# Altium PCB Board.Old.PcbDoc
Units mil, origin at the board's own origin, x right, y up, seen from the top; angles counter-clockwise.
Board outline 3937.99 x 2755.91 mil, 2 copper layers (Top Layer, Bottom Layer); 52 components, 38 nets, 147 pads, 112 vias.
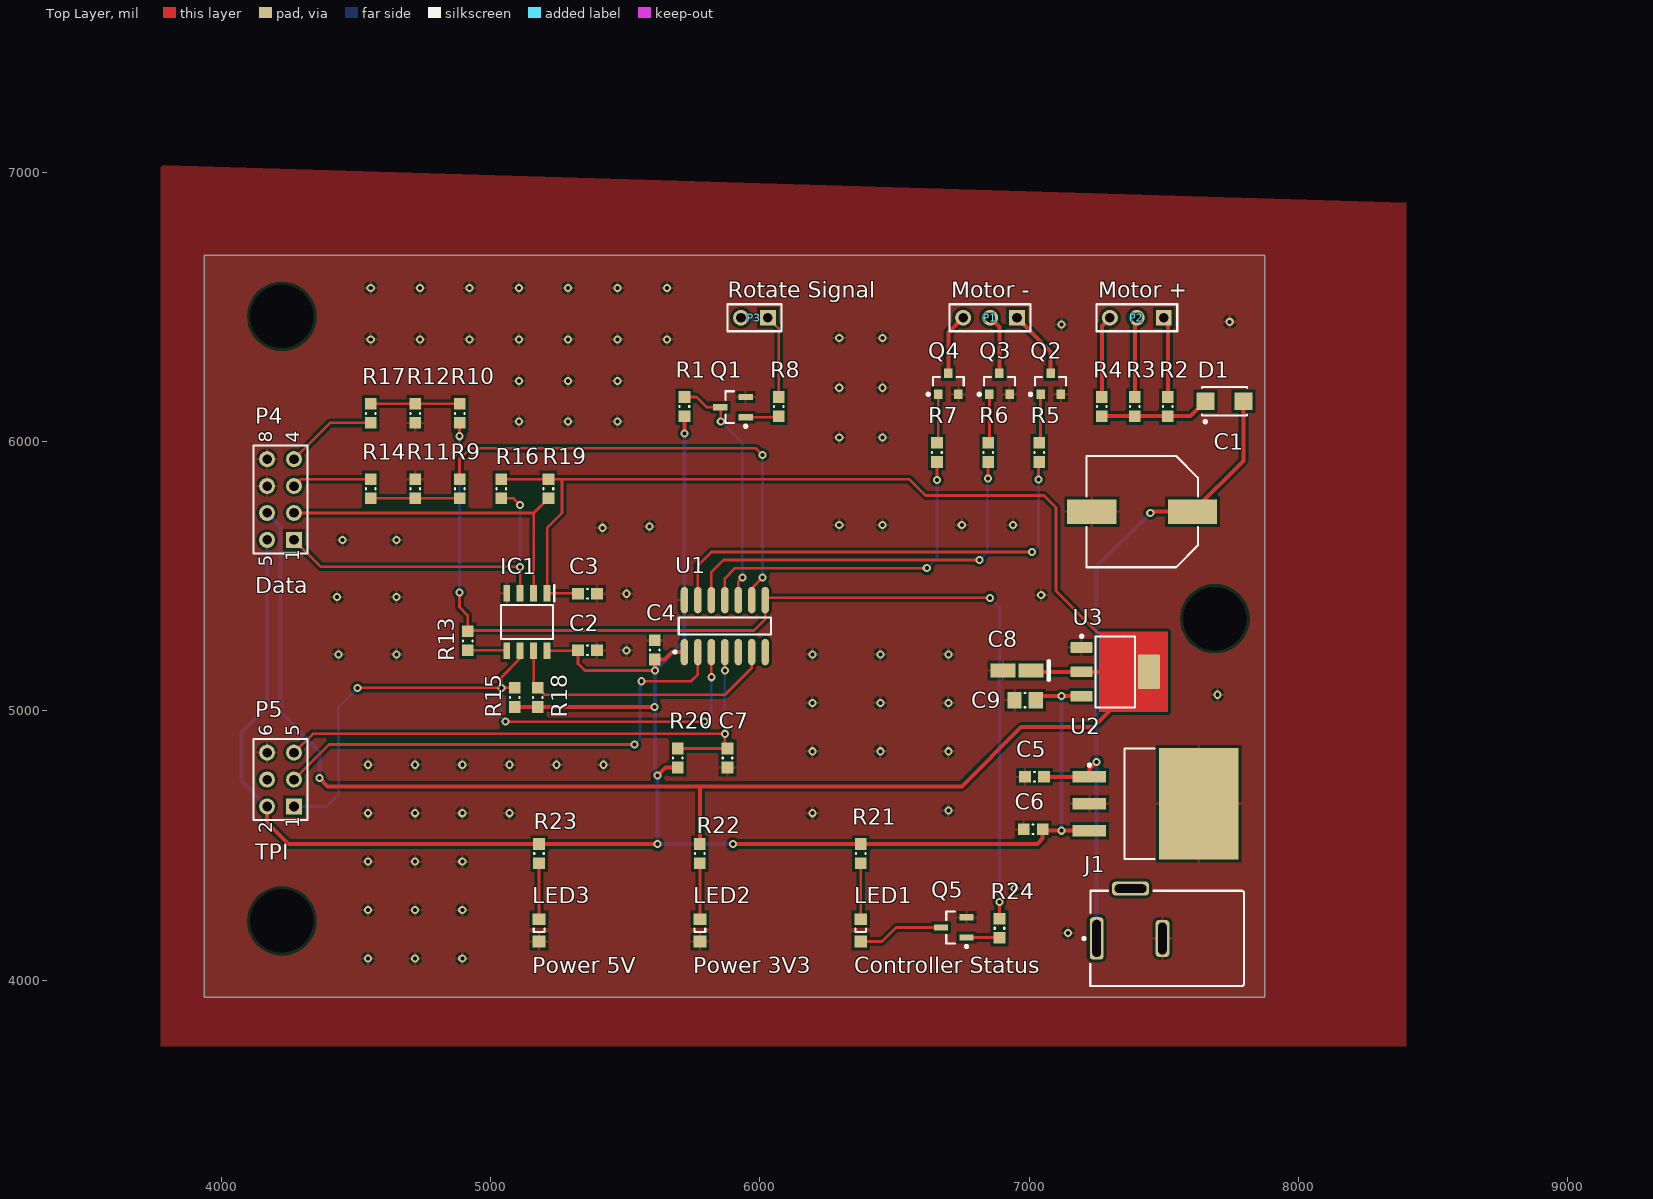
[diagram p0: Top Layer view]
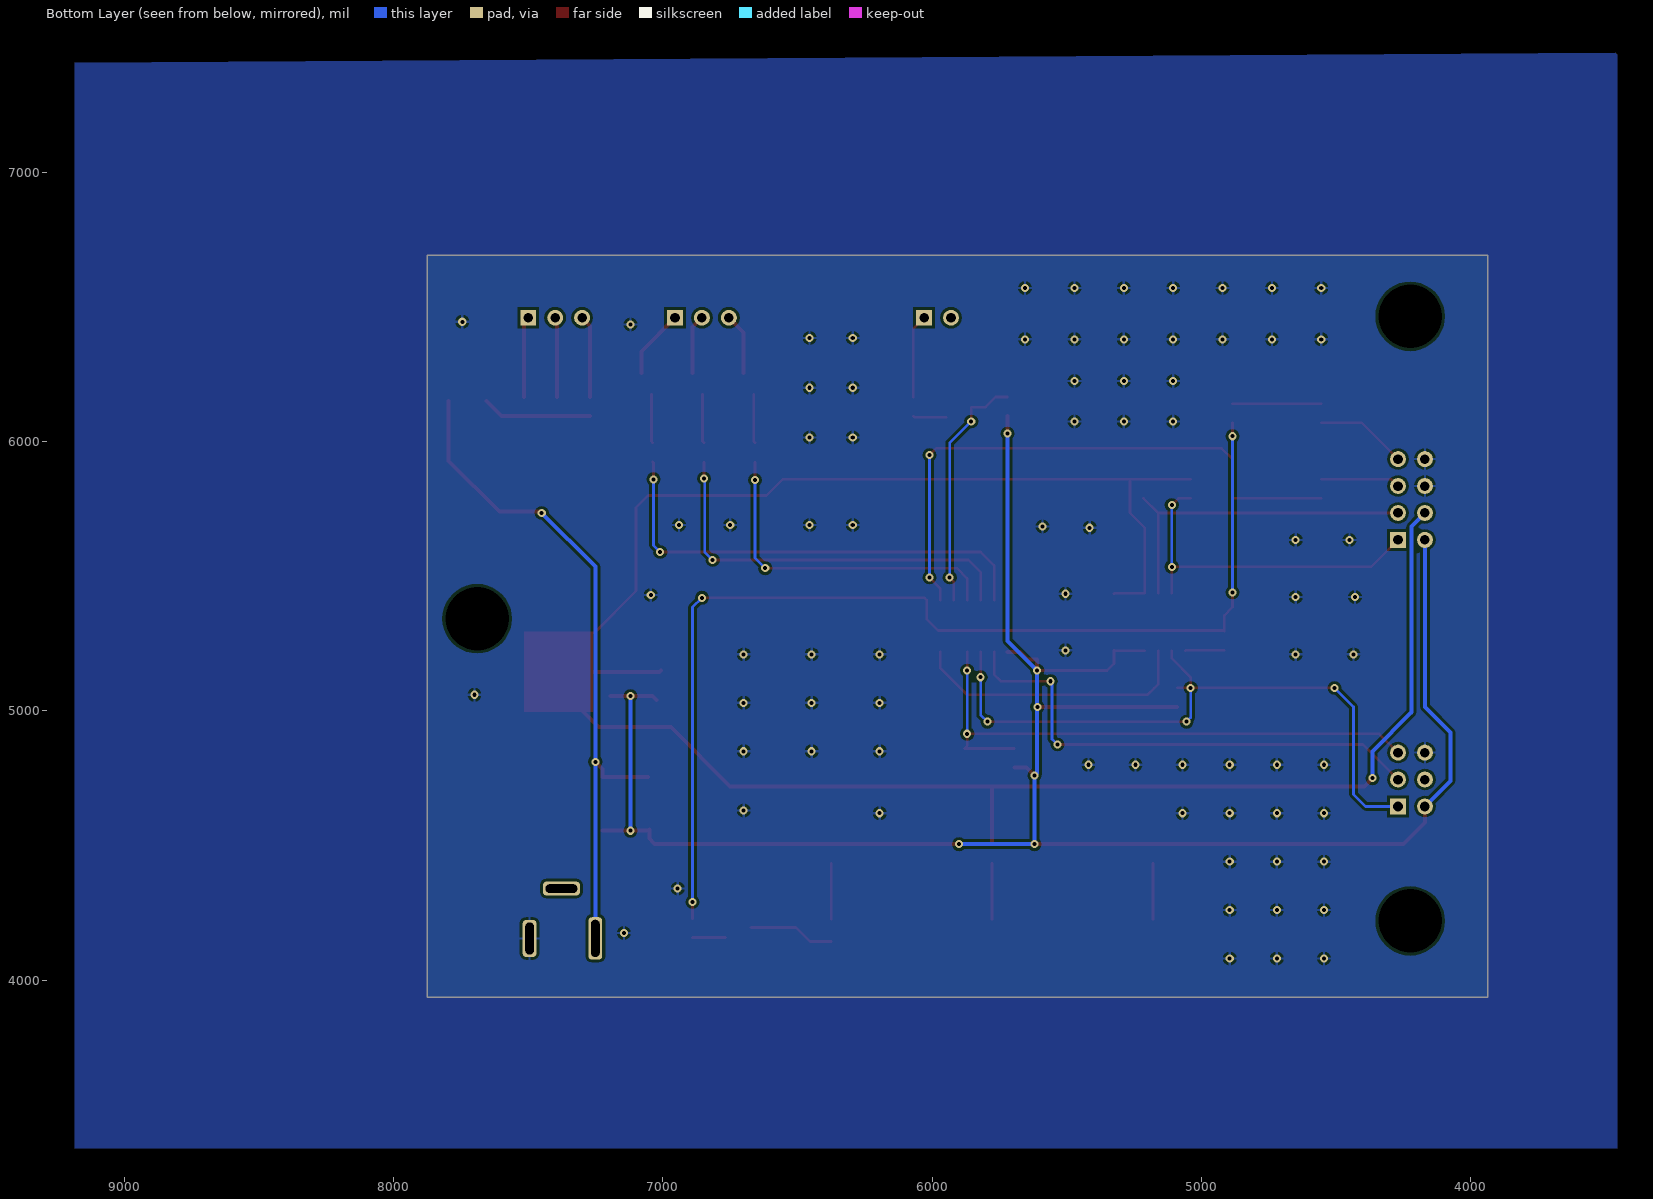
[diagram p1: Bottom Layer view, seen from below]

## Layer stack, top to bottom
Top Solder: solder mask 0.4, Solder Resist, Dk 3.5
Top Layer: signal copper 1.4
Dielectric 1: dielectric 12.6, FR-4, Dk 4.8
Bottom Layer: signal copper 1.4
Bottom Solder: solder mask 0.4, Solder Resist, Dk 3.5

## Board outline
3937.01,3937.01 3937.01,6692.91 7875,6692.91 7875,3937.01

## Design rules (kind name [scope] priority, off if disabled: settings)
Clearance [All] p1: gap=10 ignorepadtopadclearanceinfootprint=TRUE except(0: Arc-Hole Track-Hole SMDPad-Hole THPad-Hole Via-Hole Fill-Hole Poly-Hole Region-Hole Text-Hole)
PolygonConnect [All] p1: connectstyle=Relief reliefconductorwidth=10 reliefentries=4 polygonreliefangle="90 Angle" airgapwidth=10
RoutingVias [All] p1: holewidth=15 width=30 viastyle="Through Hole" minholewidth=12 minwidth=24 maxholewidth=100 maxwidth=200
SolderMaskExpansion [All] p1: expansion=4
Width [All] p1: maxlimit=1000 minlimit=6 preferedwidth=10
30 further rules are at their usual default settings.

## Components (designator, comment, footprint, x,y, rotation, side; value= is the part's Value field where it differs from the comment)
C1 "220uF" PNSC-ZA-G_M 7420,5740 r180 top
C2 "100nF" CAPC0603(1608)100_M 5360,5224.69 r180 top
C3 "100nF" CAPC0603(1608)100_M 5360,5435.31 r180 top
C4 "100nF" CAPC0603(1608)100_M 5610,5226.42 r270 top
C5 "220nF" CAPC0603(1608)100_M 7020,4755 r0 top
C6 "100nF" CAPC0603(1608)100_M 7015,4560 r0 top
C7 "100nF" CAPC0603(1608)100_M 5880,4825 r90 top
C8 "22uF" KEMT-A-3216-18-2_M 6955,5150 r180 top
C9 "22uF" CAPC0805(2012)145_M 6985,5040 r0 top
D1 "SS14-E3/5AT" VISH-DO-214AC-2_V 7725,6150 r180 top
IC1 "TCA9517DR" SOIC127P600X175-8N 5135,5330 r270 top
J1 "PWR" KYCN-KLDX-0202-A_V 7495,4155 r0 top
LED1 "Controller Status" 0805_A 6375,4185 r90 top
LED2 "Power 3V3" 0805_A 5777.5,4185 r90 top
LED3 "Power 5V" 0805_A 5180,4185 r90 top
P1 "Motor -" HDR1X3 6955,6460 r180 top
P2 "Motor +" HDR1X3 7500,6460 r180 top
P3 "Rotate Signal" HDR1X2 6030,6460 r180 top
P4 "Data" HDR2X4_CEN 4270,5635 r90 top
P5 "TPI" HDR2X3 4270,4645 r90 top
Q1 "2N7002" INF-PG-SOT23_M 5900,6128.03 r180 top
Q2 "NTR4003NT1G" ONSC-SOT-23-3-318-08_V 7080,6215 r90 top
Q3 "NTR4003NT1G" ONSC-SOT-23-3-318-08_V 6890,6215 r90 top
Q4 "NTR4003NT1G" ONSC-SOT-23-3-318-08_V 6700,6215 r90 top
Q5 "2N7002" INF-PG-SOT23_M 6720,4195.83 r180 top
R1 "5K1 5% 0603(1608)" RESC0603(1608)_M 5720,6130 r270 top value="5100.00 Ohm"
R2 "27R 5% 0603(1608)" RESC0603(1608)_M 7515,6130 r90 top value="27.00 Ohm"
R3 "27R 5% 0603(1608)" RESC0603(1608)_M 7392.5,6130 r90 top value="27.00 Ohm"
R4 "27R 5% 0603(1608)" RESC0603(1608)_M 7270,6130 r90 top value="27.00 Ohm"
R5 "5K1 5% 0603(1608)" RESC0603(1608)_M 7037.68,5960 r90 top value="5100.00 Ohm"
R6 "5K1 5% 0603(1608)" RESC0603(1608)_M 6847.68,5960 r90 top value="5100.00 Ohm"
R7 "5K1 5% 0603(1608)" RESC0603(1608)_M 6657.68,5960 r90 top value="5100.00 Ohm"
R8 "10K 5% 0603(1608)" RESC0603(1608)_M 6070,6130 r90 top value="10000.00 Ohm"
R9 "2K 1% 0603(1608)" RESC0603(1608)_M 4885,5825 r90 top value="2000.00 Ohm"
R10 "2K 1% 0603(1608)" RESC0603(1608)_M 4885,6105 r270 top value="2000.00 Ohm"
R11 "3K9 1% 0603(1608)" RESC0603(1608)_M 4720,5825 r270 top value="3900.00 Ohm"
R12 "3K9 1% 0603(1608)" RESC0603(1608)_M 4720,6105 r90 top value="3900.00 Ohm"
R13 "5K1 5% 0603(1608)" RESC0603(1608)_M 4915,5260.12 r90 top value="5100.00 Ohm"
R14 "3K3 5% 0603(1608)" RESC0603(1608)_M 4555,5825 r270 top value="3300.00 Ohm"
R15 "10K 5% 0603(1608)" RESC0603(1608)_M 5090,5050 r270 top value="10000.00 Ohm"
R16 "10K 5% 0603(1608)" RESC0603(1608)_M 5040,5825 r90 top value="10000.00 Ohm"
R17 "3K3 5% 0603(1608)" RESC0603(1608)_M 4555,6105 r90 top value="3300.00 Ohm"
R18 "10K 5% 0603(1608)" RESC0603(1608)_M 5175,5050 r270 top value="10000.00 Ohm"
R19 "10K 5% 0603(1608)" RESC0603(1608)_M 5215,5825 r90 top value="10000.00 Ohm"
R20 "4K7 5% 0603(1608)" RESC0603(1608)_M 5695,4825 r270 top value="4700.00 Ohm"
R21 "270R 5% 0603(1608)" RESC0603(1608)_M 6375,4470 r90 top value="270.00 Ohm"
R22 "160R 5% 0603(1608)" RESC0603(1608)_M 5777.5,4470 r90 top value="160.00 Ohm"
R23 "270R 5% 0603(1608)" RESC0603(1608)_M 5180,4470 r90 top value="270.00 Ohm"
R24 "5K1 5% 0603(1608)" RESC0603(1608)_M 6890,4192.87 r270 top value="5100.00 Ohm"
U1 "ATtiny20-SSU" 14S1_M 5870,5315 r90 top
U2 "LM7805SX/NOPB" KTT0003B_M 7470,4655 r0 top
U3 "AMS1117-3.3" DCY0004A_M 7320,5145 r0 top

## Footprints (in the part's own frame and the unit in brackets; to place one, negate y for a bottom-side part, rotate by r counter-clockwise, add the part's x,y. Pads: shape width x height; smd on the part's side, far side on the other; paste and mask are expansions set on the pad)
14S1_M [mm] "SOIC, 14-Leads, Body 8.7x3.9mm, Pitch 1.27mm, IPC Low Density"
  oval 2.5x0.7 smd: 1(-2.45,3.81) 2(-2.45,2.54) 3(-2.45,1.27) 4(-2.45,0) 5(-2.45,-1.27) 6(-2.45,-2.54) 7(-2.45,-3.81) 8(2.45,-3.81) 9(2.45,-2.54) 10(2.45,-1.27) 11(2.45,0) 12(2.45,1.27) 13(2.45,2.54) 14(2.45,3.81)
  silkscreen extent -2.57,-4.35 0.8,4.83, body extent -1.99,-4.37 1.99,4.37, height 1.75
0805_A [mm] "Chip LED, 2-Leads, Body 2.0x1.3mm, IPC Medium Density"
  rect 1.1x1.2 smd: 1(-1.05,0) 2(1.05,0)
  silkscreen extent -0.15,-0.5 0.15,0.5, body extent -1,-0.62 1,0.63, height 0.68
CAPC0603(1608)100_M [mm] "Chip Capacitor, Body 1.6x0.8mm, Height 1.0mm, IPC Low Density"
  rect 1.1x1.1 smd: 1(-0.9,0) 2(0.9,0)
  silkscreen extent -0.05,-0.45 0.05,0.45, body extent -0.87,-0.47 0.88,0.48, height 1
CAPC0805(2012)145_M [mm] "Chip Capacitor, Body 2.0x1.2mm, Height 1.45mm, IPC Low Density"
  rect 1.35x1.55 smd: 1(-1,0) 2(1,0)
  silkscreen extent -0.05,-0.67 0.05,0.67, body extent -1.1,-0.72 1.1,0.72, height 1.45
DCY0004A_M [mm] "SOT223, 4-Leads, Body 6.7x3.7mm, Pitch 2.3mm, IPC Low Density"
  rrect10% 2.05x1 smd: 1(-3.175,2.3) 2(-3.175,0) 3(-3.175,-2.3)
  rrect5% 2.05x3.25 smd: 4(3.175,0)
  silkscreen extent -3.3,-3.35 1.85,3.47, body extent -3.5,-3.25 3.5,3.25, height 1.62
HDR1X2 [mm] "Connector; Header; 2 Position"
  rect 1.5x1.5 hole 0.9: 1(0,0)
  round 1.5 hole 0.9: 2(2.54,0)
  silkscreen extent -1.27,-1.27 3.81,1.27
HDR1X3 [mm] "Connector; Header; 3 Position"
  rect 1.5x1.5 hole 0.9: 1(0,0)
  round 1.5 hole 0.9: 2(2.54,0) 3(5.08,0)
  silkscreen extent -1.27,-1.27 6.35,1.27
HDR2X3 [mm] "Connector; Header; 3x2 Position"
  rect 1.5x1.5 hole 0.9: 1(0,0)
  round 1.5 hole 0.9: 2(0,2.54) 3(2.54,0) 4(2.54,2.54) 5(5.08,0) 6(5.08,2.54)
  silkscreen extent -1.27,-1.27 6.35,3.81
HDR2X4_CEN [mm] "Connector; Header; 4x2 Position"
  rect 1.5x1.5 hole 0.9: 1(0,0)
  round 1.5 hole 0.9: 2(2.54,0) 3(5.08,0) 4(7.62,0) 5(0,2.54) 6(2.54,2.54) 7(5.08,2.54) 8(7.62,2.54)
  silkscreen extent -1.27,-1.27 8.89,3.81
INF-PG-SOT23_M [mm] "SOT23, 3-Leads, Body 2.9x1.3mm, Pitch 0.95mm, IPC Low Density"
  rect 1.35x0.6 smd: 1(-1.2,0.95) 2(-1.2,-0.95) 3(1.2,0)
  silkscreen extent -1.33,-1.5 0.7,1.92, body extent -0.7,-1.5 0.7,1.5, height 1.1
KEMT-A-3216-18-2_M [mm] "Molded TAN Capacitor, 2-Leads, Body 3.4x1.8mm, IPC Low Density"
  rect 2.35x1.35 smd: 1(-1.325,0) 2(1.325,0)
  silkscreen extent -3,-0.9 -3,0.9, body extent -1.7,-0.9 1.7,0.9, height 1.8
KTT0003B_M [mm] "D2-PAK, 3-Leads, Body 10.41x8.89mm, Pitch 2.54mm, IPC Low Density"
  rect 3.15x1.1 smd: 1(-6.25,2.54) 2(-6.25,0) 3(-6.25,-2.54)
  rect 7.5x10.55 smd: 4(4.05,0)
  silkscreen extent -6.37,-5.2 -0.1,5.2, body extent -6.67,-5.2 7.68,5.2, height 4.64
KYCN-KLDX-0202-A_V [mm] "Power Jack, 3-Leads, Body 14.5x9mm"
  rrect50% 1.3x4 hole 0.8 slot 3.5 at 90 deg: 1(-6.2,0)
  rrect50% 1.3x3.5 hole 0.8 slot 3 at 90 deg: 2(0,0)
  rrect50% 3.5x1.3 hole 0.8 slot 3 at 0 deg: 3(-3,4.7)
  silkscreen extent -7.52,-4.5 7.7,4.5, body extent -6.8,-4.5 7.7,4.9, height 10.8
ONSC-SOT-23-3-318-08_V [mm] "SOT23, 3-Leads, Body 2.92x1.3mm, Pitch 0.95mm"
  rect 0.9x0.8 smd: 1(-1,0.95) 2(-1,-0.95) 3(1,0)
  silkscreen extent -1.12,-1.46 0.65,2.02, body extent -0.65,-1.46 0.65,1.46, height 1.11
PNSC-ZA-G_M [mm] "Aluminum Electrolytic Capacitor, Body 10.30x10.30x10.50mm, IPC Low Density"
  rect 4.65x2.3 smd: 1(-4.75,0) 2(4.75,0)
  silkscreen extent -5.25,-5.25 5.25,5.25, body extent -6,-5.25 6,5.25, height 10.5
RESC0603(1608)_M [mm] "Chip Resistor, Body 1.6x0.8mm, IPC Low Density"
  rect 1.1x1.1 smd: 1(-0.9,0) 2(0.9,0)
  silkscreen extent -0.05,-0.45 0.05,0.45, body extent -0.85,-0.47 0.85,0.47, height 0.6
SOIC127P600X175-8N [mm]
  rect 1.525x0.65 smd: 1(-2.712,1.905) 2(-2.712,0.635) 3(-2.712,-0.635) 4(-2.712,-1.905) 5(2.712,-1.905) 6(2.712,-0.635) 7(2.712,0.635) 8(2.712,1.905)
  silkscreen extent -3.47,-2.45 1.6,2.58, body extent -3,-2.45 3,2.45, height 1.75
VISH-DO-214AC-2_V [mm] "SMA, 2-Leads, Body 4.245x2.665mm, Height 2.29mm"
  rect 1.7x1.68 smd: 1(-1.79,0) 2(1.79,0)
  silkscreen extent -2.12,-1.33 2.12,2.06, body extent -2.57,-1.33 2.57,1.33, height 2.29

## Part data
C1: library part CMP-2000-06221-1, "Conductive Polymer Hybrid Aluminum Electrolytic Capacitor, 220 uF, +/- 20%, 50 V, -55 to 105 degC, 2-Pin SMD (G), RoHS, Tape and Reel", Capacitance=100uF, Case Diameter=10mm, Case Height=10.5mm, Case Length=10.2mm, Manufacturer=Panasonic, Maximum Operating Temperature=+105C, Minimum Operating Temperature=-55C, Package Description="2-Pin Surface Mount Device, Body 10.3 x 10.3 mm", Package Reference=ZA-G, Ripple Current=2A, Tolerance=20%, Voltage Rating DC=50V, Brand=Panasonic, Datasheet URL=https://industrial.panasonic.com/cdbs/www-data/pdf/RDD0000/DMD0000COL56.pdf, Datasheet Version=06/2016, ESR=28mOhms, Factory Pack Quantity=500, Height=10.5mm, Load Life=10000Hour, Manufacturer URL=http://www.panasonic.com/, Mounting Technology=SurfaceMount, Packaging=Reel, Product=AluminumElectrolyticCapacitors, Product Category=AluminumOrganicPolymerCapacitors, RoHS=Details, Series=ZA, Termination Style=SMD/SMT
C2 C3 C4 C6 C7: library part CMP-1035-02592-1, "CAP 100nF 50V ±10% 0603 (1608 Metric) Thickness 1mm SMD", Case-EIA=0603, Case-Metric=1608, Rated Voltage="50 V", Tolerance=?±10%, Max Thickness="1 mm", Technology=SMT
C5: library part CMP-1035-02644-1, "CAP 220nF 16V ±10% 0603 (1608 Metric) Thickness 1mm SMD", Case-EIA=0603, Case-Metric=1608, Rated Voltage="16 V", Tolerance=?±10%, Max Thickness="1 mm", Technology=SMT
C8: library part CMP-2000-05173-1, "Capacitor, Tantalum, 22 uF, +/- 10%, 16 V, -55 to 125 degC, 2-Pin SMD (1206), RoHS, Tape and Reel", Capacitance=10uF, Case Code=A, Case Style=Molded, Manufacturer=Kemet, Operating Temp Range=-55Cto125C, Package / Case=3216-18, Package Description="2-Pin Surface Mount Device, Body 3.2 x 1.6 mm", Package Reference=1206, Tolerance (+ or -)=10%, Voltage=16VDC, Construction=SMTChip, Datasheet URL=http://www.farnell.com/datasheets/1824869.pdf, Datasheet Version=Apr-14, DCL=1.6uA, DF=8%, ESR=7ohm, Failure Rate=NotRequired, Insulation=NotRequired, Lead Spacing (nom)=NotRequiredmm, Length W/Weld=NotRequiredmm, Manufacturer URL=http://www.kemet.com/, Mounting Style=SurfaceMount, Packaging=TapeandReel, Polarity=Polar, Product Depth (mm)=1.6mm, Product Diameter (mm)=NotRequiredmm, Product Height (mm)=1.6mm, Product Length (mm)=3.2mm, Seal=NotRequired, Seated Plane Height=NotRequiredmm, Wire Form=NotRequired
C9: library part CMP-1036-04942-1, "CAP 22uF 10V ±10% 0805 (2012 Metric) Thickness 1.45mm SMD", Case-EIA=0805, Case-Metric=2012, Rated Voltage="10 V", Tolerance=?±10%, Max Thickness="1.45 mm", Technology=SMT
D1: library part CMP-0549-00004-1, "Schottky Barrier Rectifier, 40 V Maximum DC Blocking Voltage, -65 to 125 degC, 2-Pin SMA Case, RoHS", Manufacturer="Vishay Semiconductor", Operating Temperature="-65 to 125 degC", ComponentLink1Description="Manufacturer URL", ComponentLink1URL=http://www.vishay.com/, ComponentLink2Description=Datasheet, ComponentLink2URL=http://www.vishay.com/docs/88746/ss12.pdf, ComponentLink3Description="Package Specification", ComponentLink3URL=http://www.vishay.com/docs/88746/ss12.pdf, DatasheetVersion=12/17/2012, IF(AV)="1 A Max.", IFSM="40 A", Mounting Technology="Surface Mount", PackageDescription="2-Pin SMD, Body 4.245 x 2.665 mm, Height 2.29 mm", PackageReference=DO-214AC-2, PackageVersion=Dec-12, PartNumber=SS14-E3/5AT, RoHS=TRUE, VDC="40 V Max.", VRMS="28 V Max.", VRRM="40 V Max."
IC1: "Integrated Circuit", Manufacturer_Name="Texas Instruments", Mouser Part Number=595-TCA9517DR, Datasheet Link=http://www.farnell.com/datasheets/1959556.pdf, Height=1.75mm, Manufacturer_Part_Number=TCA9517DR, Mouser Price/Stock=https://www.mouser.com/Search/Refine.aspx?Keyword=595-TCA9517DR
J1: library part CMP-1673-00001-5, "DC Power Jack, 24 V, 3.5 A, -25 to 85 degC, 3-Pin THD, RoHS", Colour=Black, Current Rating="3.5 A", Manufacturer=Kycon, Max Operating Temperature="85 degC", Min Operating Temperature="-25 degC", Package Quantity=500, Voltage Rating="24 V", ComponentLink1Description="Manufacturer URL", ComponentLink1URL=http://www.kycon.com/, ComponentLink2Description=Datasheet, ComponentLink2URL=http://www.kycon.com/Pub_Eng_Draw/KLDX-0202-X.PDF, Connector Type=Power, Contact Gender=Female, Contact Material=Brass, Contact Plating=Tin, DatasheetVersion="Rev. D3, 06/2013", Height="10.8 mm", Housing Material=PBT, Length="9.2 mm", Mount="Through Hole", Mounting Technology="Through Hole", PackageDescription="3-Pin Through Hole Device, Body 14.5 x 9 mm", PackageReference=KLDX-0202-A, Pins=2, RoHSCompliant=true
LED1: library part CMP-1426-00008-1, "SMD mono-color Chip LED, WL-SMCW, Blue", Color=Blue, Manufacturer="Wuerth Elektronik", PartNumber=150080BS75000, ComponentLink1Description="Manufacturer URL", ComponentLink1URL=http://www.we-online.com, ComponentLink2Description=Datasheet, ComponentLink2URL=http://katalog.we-online.com/led/datasheet/150080BS75000.pdf, PackageReference=0805_A
LED2 LED3: library part CMP-1426-00007-1, "SMD mono-color Chip LED, WL-SMCW, Green", Color=Green, Manufacturer="Wuerth Elektronik", PartNumber=150080GS75000, ComponentLink1Description="Manufacturer URL", ComponentLink1URL=http://www.we-online.com, ComponentLink2Description=Datasheet, ComponentLink2URL=http://katalog.we-online.com/led/datasheet/150080GS75000.pdf, PackageReference=0805_A
P1 P2: library part "Header 3", "Header, 3-Pin", LatestRevisionDate=17-Jul-2002, LatestRevisionNote="Re-released for DXP Platform.", Publisher="Altium Limited"
P3: library part "Header 2", "Header, 2-Pin", LatestRevisionDate=17-Jul-2002, LatestRevisionNote="Re-released for DXP Platform.", Publisher="Altium Limited"
P4: library part "Header 4X2A", "Header, 4-Pin, Dual row", LatestRevisionDate=17-Jul-2002, LatestRevisionNote="Re-released for DXP Platform.", Publisher="Altium Limited"
P5: library part "Header 3X2", "Header, 3-Pin, Dual row", LatestRevisionDate=17-Jul-2002, LatestRevisionNote="Re-released for DXP Platform.", Publisher="Altium Limited"
Q1 Q5: library part CMP-1149-00026-1, "N-Channel OptiMOS Small-Signal-Transistor, 60 V VDS, 0.3?A ID, -55 to 150 degC, PG-SOT23, Reel, Green", Manufacturer=Infineon, ComponentLink1Description="Manufacturer URL", ComponentLink1URL=http://www.infineon.com/, ComponentLink2Description=Datasheet, ComponentLink2URL=http://www.infineon.com/dgdl/2N7002_Rev2.4.pdf?folderId=db3a3043156fd573011622e10b5c1f67&fileId=db3a304319bc939a0119c2a9461e79e6, ComponentLink3Description="Package Specification", ComponentLink3URL=http://www.infineon.com/dgdl/SOT23-Package_Overview.pdf?folderId=db3a30431936bc4b0119532290053c66&fileId=db3a30431936bc4b0119533468123c85, DatasheetVersion="Rev. 2.4", Green=TRUE, Halogen-free=TRUE, ID (max)=0.3??A, IDpuls (max)=1.2??A, Mounting Technology="Surface Mount", PackageDescription="3-Pin Small Outline Transistor Package, 2.9 x 1.3 mm Body, 0.95 mm Pitch", PackageReference=PG-SOT23, PackageVersion=Apr-08, Packing=Reel, PartNumber=2N7002, Ptot (max)=0.5??W, QG=0.4??nC, RDS (on) (max)="3,000 mOhm", RDS (on) (max) (@4.5V)="4,000 mOhm", RthJA (max)="250 K/W", VDS (max)="60 V", VGS(th) (max)=2.5??V, VGS(th) (min)=1.5??V
Q2 Q3 Q4: library part CMP-1058-00759-1, "Small Signal MOSFET, 30 V, 0.56 A, Single N-Channe, 3-Pin SOT-23, Pb-Free, Tape and Reel", Manufacturer="On Semiconductor", Package Type=SOT-23-3, Channel Polarity="N Channel", Ciss Typ (pF)=21, ComponentLink1Description="Manufacturer URL", ComponentLink1URL=http://www.onsemi.com/, ComponentLink2Description=Datasheet, ComponentLink2URL=http://www.onsemi.cn/pub_link/Collateral/NTR4003N-D.PDF, ComponentLink3Description="Package Specification", ComponentLink3URL=http://www.onsemi.cn/pub_link/Collateral/318-08.PDF, Configuration=Single, Coss Typ (pF)=19.7, Crss Typ (pF)=8.1, DatasheetVersion="Rev. 3", ID Max (A)=0.56, Mounting Technology="Surface Mount", PackageDescription="3-Pin Small Outline Transistor, Body 2.92 x 1.3 mm, Pitch 0.95 mm", PackageReference=SOT-23-3-318-08, PackageVersion="Rev. AP, 11/2009", Packing="Tape and Reel", PartNumber=NTR4003NT1G, RoHS=Pb-Free, V(BR)DSS Min (V)=30, VGS(th) Max (V)=1.4, VGS Max (V)=20
R1 R5 R6 R7 R13 R24: library part CMP-1012-00091-1, "5K1 0.1W 5% 0603 (1608 Metric)  SMD", Case-EIA=0603, Case-Metric=1608, Power="0.1 W", Tolerance="5 %", Technology=SMT
R2 R3 R4: library part CMP-1012-00036-1, "27R 0.1W 5% 0603 (1608 Metric)  SMD", Case-EIA=0603, Case-Metric=1608, Power="0.1 W", Tolerance="5 %", Technology=SMT
R8 R15 R16 R18 R19: library part CMP-1012-00098-1, "10K 0.1W 5% 0603 (1608 Metric)  SMD", Case-EIA=0603, Case-Metric=1608, Power="0.1 W", Tolerance="5 %", Technology=SMT
R9 R10: library part CMP-1012-00542-1, "2K 0.1W 1% 0603 (1608 Metric)  SMD", Case-EIA=0603, Case-Metric=1608, Power="0.1 W", Tolerance="1 %", Technology=SMT
R11 R12: library part CMP-1012-00576-1, "3K9 0.1W 1% 0603 (1608 Metric)  SMD", Case-EIA=0603, Case-Metric=1608, Power="0.1 W", Tolerance="1 %", Technology=SMT
R14 R17: library part CMP-1012-00086-1, "3K3 0.1W 5% 0603 (1608 Metric)  SMD", Case-EIA=0603, Case-Metric=1608, Power="0.1 W", Tolerance="5 %", Technology=SMT
R20: library part CMP-1012-00090-1, "4K7 0.1W 5% 0603 (1608 Metric)  SMD", Case-EIA=0603, Case-Metric=1608, Power="0.1 W", Tolerance="5 %", Technology=SMT
R21 R23: library part CMP-1012-00060-1, "270R 0.1W 5% 0603 (1608 Metric)  SMD", Case-EIA=0603, Case-Metric=1608, Power="0.1 W", Tolerance="5 %", Technology=SMT
R22: library part CMP-1012-00055-1, "160R 0.1W 5% 0603 (1608 Metric)  SMD", Case-EIA=0603, Case-Metric=1608, Power="0.1 W", Tolerance="5 %", Technology=SMT
U1: library part CMP-0093-00150-2, "8-bit AVR Microcontroller, 1.8-5.5V, 12MHz, 2KB Flash, 128 Bytes SRAM, 12 GPIO pins, 14-pin SOIC, Industrial Grade (-40°C to 85°C), Pb-Free", Code_IPC=SOIC127P600-14, Code_JEDEC=MS-012-AB, ComponentLink1Description="Manufacturer URL", ComponentLink1URL=http://www.atmel.com/, ComponentLink2Description="ATtiny20 Datasheet", ComponentLink2URL=http://www.atmel.com/dyn/resources/prod_documents/doc8235.pdf, ComponentLink3Description="ATtiny20 Summary", ComponentLink3URL=http://www.atmel.com/dyn/resources/prod_documents/8235S.pdf, DatasheetVersion="revB, Apr-2011", PackageDescription="14-Lead, 0.150a€? Wide Body, Plastic Gull Wing Small Outline Package (SOIC)", PackageReference=14S1, PackageVersion="revA, Feb-2002", RevisionNote="DatasheetVersion updated. URLs added."
U2: library part CMP-2000-07590-1, "Fixed Voltage Regulator, 1.5 A, 3-Pin TO-263 (KTT), Pb-Free (RoHS Exempt), Tube", Case\/Package=TO-263, Dropout Voltage=2V, Manufacturer="Texas Instruments", Max Operating Temperature=125degC, Min Operating Temperature=0degC, Package Description="3-Pin Plastic Flange Mount, Body 10.16 x 8.64 mm, Pitch 2.54 mm", Package Reference="TO-263 (KTT)", Quiescent Current=8mA, Datasheet URL=http://www.ti.com/lit/ds/symlink/lm7800.pdf, Datasheet Version="Rev. L, 09/2016", Lead Free=ContainsLead, Manufacturer URL=http://www.ti.com/, Mounting Technology=SurfaceMount, RoHSCompliant=False
U3: library part CMP-0062-01659-4, "800mA Low-Dropout Linear Regulator, 4-pin SOT-223", Manufacturer="Texas Instruments", PackageTopMarking=XYTT*N05A, PartNumber=LM1117MPX-3.3, PowerWise=N, Code_IPC=SOT223-4, Code_JEDEC=TO-261-AA, ComponentLink1Description="Datasheet URL", ComponentLink1URL=http://www.ti.com/general/docs/lit/getliterature.tsp?genericPartNumber=LM1117-N&fileType=pdf, CompType="LDO IC", High-Reliability=Y, PackageDescription="Molded SOT-223, 6.50 x 3.56 x 1.6mm Body, 4 Lead, 2.3mm Pitch", PackageReference=DCY0004A, PinCount=4, RoHS=N

## Free pads (board coordinates)
  round 60 hole 236.22: 5(4225,4220) 6(4225,6465) 7(7690,5342.5)

## Via types
v1: diameter 30, hole 15, Top Layer to Bottom Layer, 112 vias

## Nets (pads, with @x,y where several pads share a name; then routed paths per layer and width w, separated by ;. In a path a pad name is that pad's centre, name@x,y a point inside that pad or via, vN(x,y) a via of type N, cw(c..) or ccw(c..) an arc to the next point about the centre after c; other vN are vias at no path point)
GND: C1.2 C2.1 C3.1 C4.1 C5.1 C6.1 C7.1 C8.2 C9.1 IC1.4 J1.2 LED2.1 LED3.1 P4.7 P4.8 P5.6 Q1.2 Q2.2 Q3.2 Q4.2 Q5.2 R11.1 R12.1 U1.14 U2.2 U2.4 U3.1
  other v1: 4545,4080 4720,4080 4895,4080 7145,4175 4545,4260 4720,4260 4895,4260 6945,4340 4545,4440 4720,4440 4895,4440 4545,4620 4720,4620 4895,4620 5070,4620 6195,4620 6700,4630 4545,4800 4720,4800 4895,4800 5070,4800 5245,4800 5420,4800 6195,4850 6447.5,4850 6700,4850 6195,5030 6447.5,5030 6700,5030 7700,5060 4435,5210 4650,5210 6195,5210 6447.5,5210 6700,5210 5505,5225 4430,5422.5 4650,5422.5 7045,5430 5505,5435 4450,5635 4650,5635 5415,5680 5590,5685 6295,5690 6455,5690 6750,5690 6940,5690 6295,6015 6455,6015 5105,6075 5288.33,6075 5471.67,6075 6295,6200 6455,6200 5105,6225 5288.33,6225 5471.67,6225 4555,6380 4738.33,6380 4921.67,6380 5105,6380 5288.33,6380 5471.67,6380 5655,6380 6295,6385 6455,6385 7120,6435 7745,6445 4555,6570 4738.33,6570 4921.67,6570 5105,6570 5288.33,6570 5471.67,6570 5655,6570
MCTR1: R5.1 U1.13 | length 1735.3
  Top Layer w10: U1.13 5770,5540 5820,5590 v1(7010,5590) ; v1(7035,5860) 7035,5921.89 R5.1
  Bottom Layer w10: v1(7010,5590) 7035,5615 v1(7035,5860)
MCTR2: R6.1 U1.12 | length 1495.3
  Top Layer w10: U1.12 5820,5515 5865,5560 v1(6815,5560) ; v1(6847.68,5862.68) R6.1
  Bottom Layer w10: v1(6815,5560) 6845,5590 6845,5860 v1(6847.68,5862.68)
MCTR3: R7.1 U1.11 | length 1256.7
  Top Layer w10: U1.11 5870,5492.43 5907.57,5530 v1(6620,5530) ; v1(6657.68,5857.32) R7.1
  Bottom Layer w10: v1(6620,5530) 6657.68,5567.68 v1(6657.68,5857.32)
MFB: Q1.3 R1.1 U1.10 | length 905.1
  Top Layer w10: R1.1 5764.57,6165.43 5801.97,6128.03 Q1.3 5855,6125.79 v1(5855,6075) ; U1.10 5920,5480 v1(5935,5495)
  Bottom Layer w10: v1(5855,6075) 5935,5995 v1(5935,5495)
NetD1_2: D1.2 R2.1 R3.1 R4.1 | length 407.5
  Top Layer w15: R4.1 R3.1 R2.1 7599.09,6094.57 D1.2
NetIC1_5: IC1.5 R13.1 | length 145.6
  Top Layer w10: R13.1 5058.54,5224.69 IC1.5
NetLED1_1: LED1.1 Q5.3 | length 319.4
  Top Layer w10: LED1.1 6453.66,4143.66 6505.83,4195.83 Q5.3
NetLED1_2: LED1.2 R21.1 | length 208.2
  Top Layer w10: LED1.2 R21.1
NetLED2_2: LED2.2 R22.1 | length 208.2
  Top Layer w10: LED2.2 R22.1
NetLED3_2: LED3.2 R23.1 | length 208.2
  Top Layer w10: LED3.2 R23.1
NetP1_1: P1.1 Q2.3 | length 257.4
  Top Layer w15: P1.1 7080,6335 Q2.3
NetP1_2: P1.2 Q3.3 | length 220.1
  Top Layer w15: P1.2 6890,6425 Q3.3
NetP1_3: P1.3 Q4.3 | length 228.4
  Top Layer w15: Q4.3 6700,6405 P1.3
NetP2_1: P2.1 R2.2 | length 300.8
  Top Layer w15: P2.1 7515,6445 R2.2
NetP2_2: P2.2 R3.2 | length 297.7
  Top Layer w15: R3.2 7392.5,6452.5 P2.2
NetP2_3: P2.3 R4.2 | length 307
  Top Layer w15: R4.2 7270,6430 P2.3
NetP3_1: P3.1 R8.2 | length 311.1
  Top Layer w10: P3.1 6070,6420 R8.2
NetP4_3: P4.3 R14.1 | length 295.5
  Top Layer w10: P4.3 4295.43,5860.43 R14.1
NetP4_4: P4.4 R17.1 | length 340.7
  Top Layer w10: P4.4 4404.57,6069.57 R17.1
NetQ1_1: Q1.1 R8.1 | length 124.4
  Top Layer w10: Q1.1 6066.06,6090.63 R8.1
NetQ2_1: Q2.1 R5.2 | length 182.2
  Top Layer w10: R5.2 7042.6,6000.35 Q2.1
NetQ3_1: Q3.1 R6.2 | length 182.2
  Top Layer w10: R6.2 6852.6,6000.35 Q3.1
NetQ4_1: Q4.1 R7.2 | length 182.2
  Top Layer w10: R7.2 6662.6,6000.35 Q4.1
NetQ5_1: Q5.1 R24.2 | length 123.2
  Top Layer w10: Q5.1 6889.02,4158.43 R24.2
R\S\T\: C7.2 P5.5 R20.1 U1.4 | length 2176.2
  Top Layer w10: P5.5 4340,4915 v1(5870,4915) 5870,4870.43 C7.2 R20.1 ; v1(5870,5150) U1.4
  Bottom Layer w10: v1(5870,4915) v1(5870,5150)
RDY: R9.2 U1.9 | length 1781.6
  Top Layer w10: R9.2 4885,5935 4925,5975 5985,5975 v1(6010,5950) ; U1.9 5970,5455 v1(6010,5495)
  Bottom Layer w10: v1(6010,5495) v1(6010,5950)
RDY3V3: R9.1 R11.2 R14.2 | length 330
  Top Layer w10: R14.2 R11.2 R9.1
SCL3V3: IC1.2 P4.2 R19.1 | length 1266
  Top Layer w10: P4.2 5160.43,5735 ; IC1.2 5160,5734.57 5160.43,5735 ; R19.1 5160.43,5735
SCL5V: IC1.7 R18.1 U1.6 | length 1049.5
  Top Layer w10: IC1.7 5160,5100.43 R18.1 5200.43,5060 5870,5060 5970,5160 U1.6
SDA3V3: IC1.3 P4.1 R16.1 | length 1289.8
  Top Layer w10: P4.1 4370,5535 v1(5110,5535) IC1.3 ; R16.1 5085.43,5789.57 v1(5110,5765)
  Bottom Layer w10: v1(5110,5535) v1(5110,5765)
SDA5V: IC1.6 P5.1 R15.1 U1.3 | length 2500.1
  Top Layer w10: v1(4505.43,5085.43) v1(5040,5085.43) ; v1(5055,4960) v1(5795,4960) ; R15.1 v1(5040,5085.43) ; IC1.6 5110,5195 5040,5125 v1(5040,5085.43) ; v1(5820,5125) U1.3
  Bottom Layer w10: P5.1 4390,4645 4435,4690 4435,5015 v1(4505.43,5085.43) ; v1(5040,5085.43) 5040,4975 v1(5055,4960) ; v1(5795,4960) 5820,4985 v1(5820,5125)
STATUS: R10.2 R13.2 R24.1 U1.8 | length 4024.8
  Top Layer w10: v1(4885,5440) 4885,5385 4915,5355 R13.2@4915,5298.5 ; v1(4885,6020) R10.2 ; R13.2 R13.2@4915,5298.5 ; v1(6855,5420) 6028.54,5420 U1.8 6020,5340 5978.5,5298.5 R13.2@4915,5298.5 ; R24.1 v1(6890,4290)
  Bottom Layer w10: v1(4885,5440) v1(4885,6020) ; v1(6855,5420) 6890,5385 v1(6890,4290)
STATUS3V3: R10.1 R12.2 R17.2 | length 330
  Top Layer w10: R17.2 R12.2 R10.1
TPICLK: P5.3 U1.2 | length 1868.1
  Top Layer w10: P5.3 4400,4875 v1(5535,4875) ; v1(5560,5110) 5745,5110 5770,5135 U1.2
  Bottom Layer w10: v1(5535,4875) 5555,4895 5555,5105 v1(5560,5110)
VDD3V3: C3.2 C8.1 IC1.1 P4.6 R16.2 R19.2 R22.2 U3.2 U3.4 | length 8434.3
  Top Layer w10: R16.2 R19.2 5265,5860.43 ; C3.2 5323.11,5436.77 IC1.1 5210,5680 5265,5735 5265,5860.43 ; U3.4 7300,5290 7255,5290 7100,5445 7100,5755 7055,5800 6615,5800 6554.57,5860.43 5265,5860.43
  Top Layer w15: v1(4365,4750) 4395,4720 5775,4720 ; R22.2 5777.5,4717.5 5775,4720 ; C8.1 7012.17,5145 U3.2 U3.4 7240,4940 6970,4940 6750,4720 5775,4720
  Bottom Layer w15: P4.6 4220,5685 4220,4995 4365,4850 v1(4365,4750)
VDD5V: C2.2 C4.2 C6.2 C9.2 IC1.8 P4.5 P5.2 R1.2 R15.2 R18.2 R20.2 R21.2 R23.2 U1.1 U2.3 U3.3 | length 7806.4
  Top Layer w10: IC1.8 5323.11,5223.23 C2.2 5324.57,5175.43 5350,5150 v1(5610,5150)
  Top Layer w15: P5.2 4170,4585 4249.57,4505.43 R23.2 5180.43,4505 v1(5620,4505) ; R15.2 R18.2 v1(5609.57,5014.57) ; v1(5610,5150) C4.2 5645.98,5190.98 5673.54,5218.54 U1.1 ; v1(5620,4760) 5649.57,4789.57 R20.2 ; v1(5720,6030) R1.2 ; v1(5900,4505) 6374.57,4505 R21.2 7030.43,4505.43 7050.43,4525.43 C6.2 7055.43,4555 v1(7120,4555) U2.3 ; C9.2 7038.82,5054.45 U3.3
  Bottom Layer w15: P5.2 4075,4740 4075,4920 4170,5015 P4.5 ; v1(5720,6030) 5720,5260 v1(5610,5150) 5610,4770 v1(5620,4760) v1(5620,4505) v1(5900,4505) ; v1(7120,4555) v1(7120,5055)
VDD12V: C1.1 C5.2 D1.1 J1.1 U2.1 | length 2545.2
  Top Layer w15: C5.2 U2.1 7223.94,4783.94 v1(7250.91,4810.91) ; v1(7450,5735) 7455,5740 C1.1 7795.47,5928.46 D1.1
  Bottom Layer w15: J1.1 v1(7250.91,4810.91) 7250.91,5535.91 v1(7450,5735)
pads on no net: J1.3 P3.2 P5.4 U1.5 U1.7

## Polygon pours and split planes (outlines as drawn)
GND on Bottom Layer "Bottom Layer-GND" (solid, remove dead copper, pour order 2): 3455,7445 3455,3375 9185,3375 9185,7406.98
GND on Top Layer "Top Layer-GND" (solid, remove dead copper, pour order 0): 3775,7027.29 3775,3755 8400,3755 8400,6887.29

## Other copper
Top Layer:
  rectangle net VDD3V3: 7260,4995 7515,5295

## Silkscreen, mask and mechanical layers (free items; w line width, h text height)
Mechanical 1:
  lines w10: 7874.02,3937.01 7874.02,6692.91 ; 8070.87,3937.01 3937.01,3937.01 3937.01,6692.91 8070.87,6692.91

## Text inside footprints (layer, text, board x,y; h text height)
P4: Top Overlay "5" at 4190,5535 h50 r90; Top Overlay "1" at 4290,5555 h50 r90; Top Overlay "4" at 4290,5995 h50 r90; Top Overlay "8" at 4190,5995 h50 r90
P5: Top Overlay "6" at 4190,4905 h50 r90; Top Overlay "5" at 4290,4905 h50 r90; Top Overlay "2" at 4190,4545 h50 r90; Top Overlay "1" at 4290,4565 h50 r90